# EAGLE board RS232_Websocket (EAGLE 7.2.0)
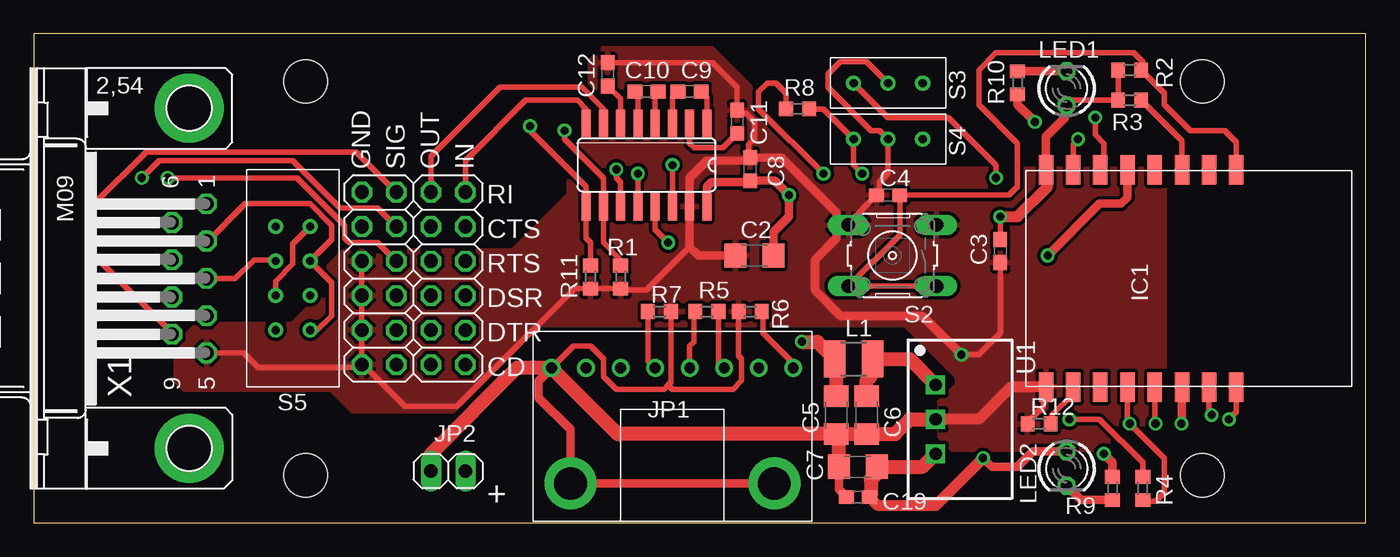
[diagram p0: board, top side]
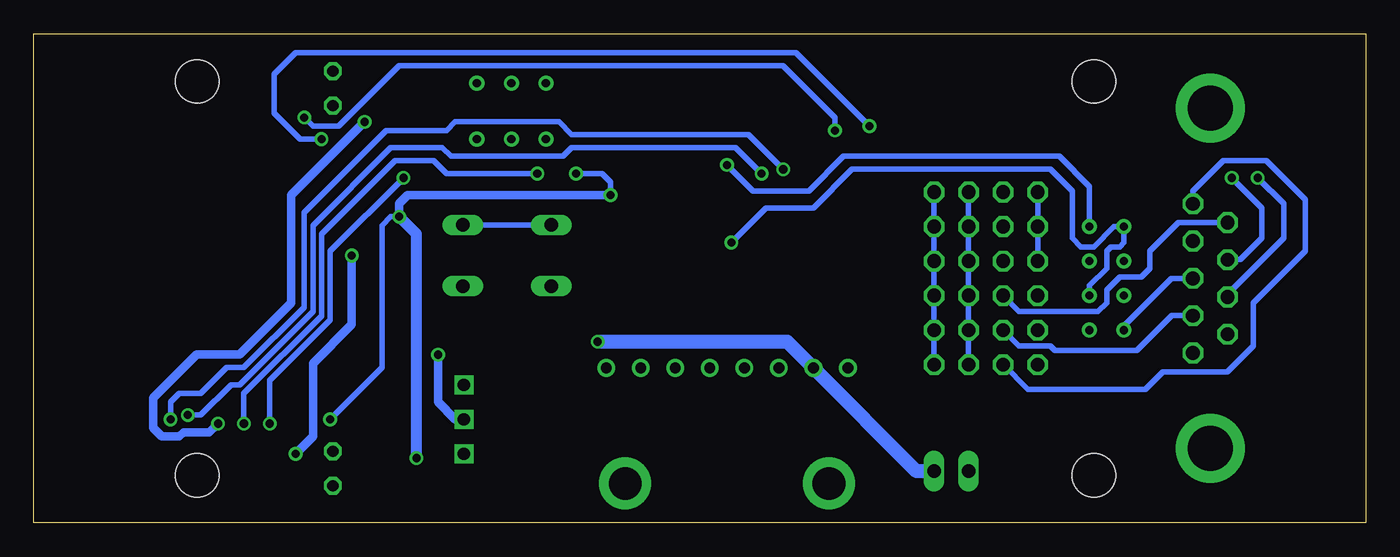
[diagram p1: board, bottom side, seen from below]

Size 98 x 36 mm. Coordinates in mm from the lower left corner, seen from the top.
Outline: 0,0 98,0 98,36 0,36 0,0
Copper layers (1*16): Top 0.035mm / dielectric 1.5mm / Bottom 0.035mm
Design rules "default *": minimum track width 10mil, minimum drill 18mil, track to track 8mil, track to pad 8mil, pad to pad 8mil, via to via 8mil, smd to smd 8mil, copper to edge 34mil, drill to drill 8mil, minimum pad ring 10mil, minimum via ring 8mil, stop-mask expansion 4mil, vias tented up to drill 0mil, thermal gap 10mil
Holes 3.2 mm at 20,32.5 20,3.5 86,32.5 86,3.5

## Footprints (pad centres in the part's own frame; a part is rotated, then mirrored left to right if it is on the bottom)
C1206 = smd 1.6 x 1.8: 1 -1.4,0; 2 1.4,0
C0603 = smd 1.1 x 1: 1 -0.85,0; 2 0.85,0
ESP8266MOD = smd 2.184 x 1.067: ADC -8,1.48; EN -8,-0.52; GND 8,-10.52; GPIO0 8,-4.52; GPIO2 8,-6.52; GPIO4 8,-2.52; GPIO5 8,-0.52; GPIO12 -8,-6.52; GPIO13 -8,-8.52; GPIO14 -8,-4.52; GPIO15 8,-8.52; GPIO16 -8,-2.52; RST -8,3.48; RXD 8,1.48; TXD 8,3.48; VCC -8,-10.52
SO16 = smd 0.66 x 2.032: 1 -4.445,-3.073; 2 -3.175,-3.073; 3 -1.905,-3.073; 4 -0.635,-3.073; 5 0.635,-3.073; 6 1.905,-3.073; 7 3.175,-3.073; 8 4.445,-3.073; 9 4.445,3.073; 10 3.175,3.073; 11 1.905,3.073; 12 0.635,3.073; 13 -0.635,3.073; 14 -1.905,3.073; 15 -3.175,3.073; 16 -4.445,3.073
USB-C_BREAKOUT = drill 0.8: CC1 1.27,-4.3; CC2 -8.89,-4.3; D+ -3.81,-4.3; D- -1.27,-4.3; GND 8.89,-4.3; S_BU1 -6.35,-4.3; S_BU2 3.81,-4.3; VBUS 6.35,-4.3 | drill 2.4 pad 3.81: G -7.5,4.2; G2 7.5,4.2
1X02 = drill 1.016 long: 1 -1.27,0; 2 1.27,0
2X06 = drill 1.016 octagon: 1 -6.35,-1.27; 2 -6.35,1.27; 3 -3.81,-1.27; 4 -3.81,1.27; 5 -1.27,-1.27; 6 -1.27,1.27; 7 1.27,-1.27; 8 1.27,1.27; 9 3.81,-1.27; 10 3.81,1.27; 11 6.35,-1.27; 12 6.35,1.27
R1210 = smd 1.6 x 2.7: 1 -1.4,0; 2 1.4,0
LED3MM = drill 0.813 octagon: A -1.27,0; K 1.27,0
R0603 = smd 1 x 1.1: 1 -0.85,0; 2 0.85,0
B3F-10XX = drill 1.016 long: 1 -3.251,2.261; 2 3.251,2.261; 3 -3.251,-2.261; 4 3.251,-2.261
2POS_SWITCH = drill 0.6: L -2.54,0; M 0,0; R 2.54,0
3X2_SWITCH = drill 0.6: 1L -3.81,1.27; 1R -3.81,-1.27; 2L -1.27,1.27; 2R -1.27,-1.27; 3L 1.27,1.27; 3R 1.27,-1.27; 4L 3.81,1.27; 4R 3.81,-1.27
TSR-1 = drill 0.9 square: 1 -2.54,0; 2 0,0; 3 2.54,0
M09HP = drill 1.016 octagon: 1 -5.486,1.27; 2 -2.743,1.27; 3 0,1.27; 4 2.743,1.27; 5 5.486,1.27; 6 -4.115,-1.27; 7 -1.372,-1.27; 8 1.372,-1.27; 9 4.115,-1.27 | drill 3.302 pad 5.08: G1 -12.522,0; G2 12.522,0

## Placement (x,y rotation side)
C2  10µF  [C1206]  53.02,19.68 180 top
C3  100nF  [C0603]  71.12,20 270 top
C4  47nF  [C0603]  62.87,24.13 0 top
C5  4.7µF  [C1206]  59.05,7.94 270 top
C6  4.7µF  [C1206]  61.28,7.94 270 top
C7  10µF  [C1206]  60.64,4.13 180 top
C8  100nF  [C0603]  52.7,26.04 90 top
C9  100nF  [C0603]  48.26,31.75 0 top
C10  100nF  [C0603]  45.09,31.75 0 top
C11  100nF  [C0603]  51.75,29.53 270 top
C12  100nF  [C0603]  42.23,33.02 270 top
C19  100nF  [C0603]  60.64,1.91 180 top
IC1  ESP8266MOD_AI  [ESP8266MOD]  85,18 270 top
IC2  MAX3232SO16  [SO16]  45.09,26.35 180 top
JP1  USB-C_BREAKOUT  [USB-C_BREAKOUT]  46.99,7.1 180 top
JP2  Backup Supply  [1X02]  30.48,3.81 0 top
JP3  [2X06]  25.4,18 90 top
JP4  [2X06]  30.48,18 90 top
L1  L-EU-SMD  [R1210]  60.33,12.06 0 top
LED1  [LED3MM]  76,32 90 top
LED2  [LED3MM]  76,4 270 top
R1  10k  [R0603]  43.18,18.1 90 top
R2  10k  [R0603]  80.64,33.34 180 top
R3  10k  [R0603]  80.64,31.11 180 top
R4  10k  [R0603]  81.6,2.54 90 top
R5  100k  [R0603]  49.53,15.56 0 top
R6  10k  [R0603]  52.7,15.56 180 top
R7  10k  [R0603]  46.04,15.56 0 top
R8  10k  [R0603]  56.2,30.48 180 top
R9  220R ?  [R0603]  79.38,2.54 270 top
R10  220R ?  [R0603]  72.39,32.38 90 top
R11  10k  [R0603]  40.96,18.1 90 top
R12  10k  [R0603]  73.98,7.3 0 top
S2  RESET  [B3F-10XX]  63.18,19.68 180 top
S3  Boot Mode Switch  [2POS_SWITCH]  62.87,32.38 0 top
S4  Config Switch  [2POS_SWITCH]  62.87,28.26 0 top
S5  3X2_SWITCH  [3X2_SWITCH]  19.05,18 90 top
U1  TSR_1-2433  [TSR-1]  66.36,7.62 270 top
X1  [M09HP]  11.43,18 270 top

## Library data of the parts
C2-C12 C19 R1-R12 = resistor
IC1 = ESP8266MOD_AiThinker
IC2 = maxim-7a
JP1 = USB-C Breakout Ada
JP2-JP4 = pinhead
L1 = HansSeine
LED1 LED2 = led
S2 = switch-omron; MPN: B3F-1000; OC_FARNELL: 176432; OC_NEWARK: 36M3542
S3 S4 = 3-Step-Switch
S5 = Switches
U1 = _traco_tsr-1
X1 = con-subd; OC_FARNELL: unknown; OC_NEWARK: unknown

## Nets
CD: JP3.1 X1.1
CTS: JP3.9 X1.8
DSR: JP3.5 X1.6
DTR: JP3.3 X1.4
GND: C2.2 C3.2 C4.1 C5.2 C6.2 C7.2 C8.2 C11.1 C12.1 C19.2 IC1.GND IC2.15 JP1.G JP1.G2 JP1.GND JP2.1 JP3.2 JP3.4 JP3.6 JP3.8 JP3.10 JP3.12 R1.1 R6.2 R7.2 R11.1 R12.1 S2.3 S2.4 S3.M S4.M U1.2 X1.5
N$1: C5.1 JP1.VBUS JP2.2 L1.1
N$2: C4.2 IC1.RST R2.1 S2.1 S2.2
N$3: IC1.GPIO15 R12.2
N$4: JP1.D- R5.1
N$5: JP1.D+ R5.2
N$6: JP1.CC2 R6.1
N$7: JP1.CC1 R7.1
N$8: IC1.EN R3.1
N$9: IC1.GPIO0 R4.1 S3.L
N$12: IC1.GPIO4 R8.1 S4.L
N$16: LED2.K R9.2
N$17: IC1.GPIO14 R9.1
N$18: LED1.K R10.2
N$19: IC1.GPIO5 R10.1
N$22: IC2.13 S5.2R S5.4L
N$23: IC2.14 S5.2L S5.4R
N$24: IC2.7 JP4.2 JP4.4 JP4.6 JP4.8 JP4.10 JP4.12
N$25: IC2.8 JP4.1 JP4.3 JP4.5 JP4.7 JP4.9 JP4.11
N$26: C11.2 IC2.2
N$27: C12.2 IC2.6
N$28: C10.1 IC2.5
N$29: C10.2 IC2.4
N$30: C9.1 IC2.3
N$31: C9.2 IC2.1
N$32: IC1.TXD IC2.11
N$33: IC1.RXD IC2.12
N$34: IC1.GPIO12 IC2.10 R1.2
N$35: IC1.GPIO13 IC2.9 R11.2
RI: JP3.11 X1.9
RTS: JP3.7 X1.7
RX: S5.1R S5.3R X1.2
TX: S5.1L S5.3L X1.3
VCC: C2.1 C3.1 C7.1 C8.1 C19.1 IC1.VCC IC2.16 LED1.A LED2.A R2.2 R3.2 R4.2 R8.2 U1.3
VI: C6.1 L1.2 U1.1

## Tracks (layer width: path | path; a pad name or v marks a point on that pad's centre or on a via)
CD
  Bottom 0.406: X1.1 12.7,24.45 10.48,26.67 7.3,26.67 4.45,23.81 4.45,20 8.26,16.19 8.26,13.02 10.16,11.11 14.92,11.11 16.19,9.84 24.86,9.84 JP3.1
CTS  (via drill 0.6)
  Top 0.406: v7.94,25.4 9.21,26.67 19.05,26.67 22.54,23.18 25.3,23.18 JP3.9
  Bottom 0.406: X1.8 10.16,16.83 6.03,20.95 6.03,23.5 v7.94,25.4
DSR
  Bottom 0.406: X1.6 13.76,22.11 15.88,20 15.88,18.73 16.51,18.1 18.1,18.1 19.05,17.14 19.05,16.19 19.68,15.56 25.5,15.56 JP3.5
DTR
  Bottom 0.406: X1.4 14.27,15.26 16.83,12.7 22.86,12.7 23.18,13.02 25.5,13.02 JP3.3
GND  (via drill 0.6)
  Top 0.406: X1.5 15.43,12.51 16.51,11.43 23.91,11.43 | 23.91,11.43 JP3.2 JP3.4 JP3.6 JP3.8 | C12.1 49.95,33.87 51.75,32.07 C11.1 51.97,30.16 52.39,30.16 53.02,29.53 53.02,28.26 52.6,27.84 52.6,26.99 | 23.91,11.43 24.45,11.43 27.3,8.57 31.11,8.57 39.79,17.25 R11.1 R1.1 43.28,17.14 45.09,17.14 48.26,20.32 | C3.2 71.12,13.97 69.53,12.38 v68.26,12.38 | S2.4 59.93,22.05 C4.1 62.23,24.34 62.23,25.08 62.87,25.72 S4.M 62.23,28.89 61.59,28.89 58.42,32.07 58.42,33.02 59.37,33.97 61.28,33.97 S3.M | R7.2 46.89,10.38 46.67,10.16 | 46.67,10.16 46.35,9.84 42.86,9.84 41.91,10.79 41.91,12.06 40.96,13.02 39.72,13.02 JP1.GND | R6.2 51.85,12.28 52.07,12.06 52.07,10.48 51.44,9.84 46.99,9.84 46.67,10.16 | R12.1 73.13,7.41 74.3,8.57 74.3,9.81 IC1.GND
  Top 0.61: C7.2 59.24,2.46 C19.2 | JP1.GND 37.15,10.45 37.15,9.21 39.49,6.87 JP1.G2 JP1.G | 52.6,26.99 C8.2 | C8.2 55.03,26.89 59.05,22.86 59.05,21.91 | v68.26,12.38 65.41,15.24 59.37,15.24 57.47,17.14 57.47,19.37 59.05,20.95 59.05,21.91 | C8.2 52.49,26.67 49.53,26.67 48.26,25.4 IC2.15 48.26,20.32 48.9,19.68 C2.2 | S2.4 59.09,21.95 59.05,21.91
  Top 0.813: IC1.GND 71.91,10 69.53,7.62 U1.2
  Top 1.016: C5.2 42.96,6.54 JP1.GND 38.07,11.43 35.56,11.43 29.21,5.08 JP2.1 | C5.2 C6.2 63.37,6.54 64.45,7.62 U1.2 | C7.2 59.24,6.35 C5.2
  Bottom 0.406: JP3.8 JP3.10 JP3.12 | S2.4 S2.3
  Bottom 0.61: v68.26,12.38 68.26,8.89 66.99,7.62 U1.2
  pour Top (isolate 0.254): 11.11,9.84 21.91,9.84 23.5,8.26 30.8,8.26 35.88,13.34 37.15,14.61 64.14,14.61 67.94,10.79 67.94,10.16 66.67,8.89 66.67,6.35 67.63,5.4 81.28,5.4 83.19,7.3 83.19,25.08 82.23,26.04 58.74,26.04 55.24,29.53 49.53,35.24 42.23,35.24 40.96,33.97 40.96,28.89 39.37,27.3 39.37,24.13 35.24,20 22.86,20 21.59,18.73 21.59,17.14 19.05,14.61 12.06,14.61 10.48,13.02 10.48,10.48
N$1  (via drill 0.6)
  Top 1.016: C5.1 59.05,11.94 L1.1 57.66,13.34 v56.52,13.34
  Bottom 1.016: JP2.2 33.05,3.81 JP1.VBUS 42.55,13.3 42.55,13.34 v56.52,13.34
N$2
  Top 0.406: IC1.RST 88.48,28.04 87.63,28.89 85.09,28.89 83.19,30.8 83.19,31.65 R2.1 81.6,33.44 81.6,33.97 80.96,34.61 70.8,34.61 69.53,33.34 69.53,30.8 72.39,27.94 72.39,24.77 71.75,24.13 C4.2 63.72,21.21 S2.2 S2.1
N$3
  Top 0.406: IC1.GPIO15 76.48,9.49 74.93,7.94 74.93,7.41 R12.2
N$4
  Top 0.406: JP1.D- 48.26,13.02 48.58,13.34 48.58,15.46 R5.1
N$5
  Top 0.406: JP1.D+ 50.38,11.82 R5.2
N$6
  Top 0.406: JP1.CC2 55.88,11.75 53.66,13.97 53.66,15.46 R6.1
N$7
  Top 0.406: R7.1 45.19,11.93 JP1.CC1
N$8
  Top 0.406: IC1.EN 84.48,28.13 R3.1
N$9  (via drill 0.6)
  Top 0.406: R4.1 81.7,1.59 82.55,1.59 83.19,2.22 83.19,4.76 v80.64,7.3 80.48,7.47 IC1.GPIO0 | v70.8,25.4 70.8,26.35 67.31,29.84 62.87,29.84 S3.L
  Bottom 0.406: v70.8,25.4 76.2,20 76.2,14.92 80.64,10.48 v80.64,7.3
N$12  (via drill 0.6)
  Top 0.406: IC1.GPIO4 82.48,7.37 v82.55,7.3 | R8.1 58.1,30.48 S4.L 60.33,26.35 v60.96,25.72
  Bottom 0.406: v60.96,25.72 67.63,25.72 68.58,26.67 71.44,26.67 76.83,21.27 76.83,15.24 82.55,9.53 v82.55,7.3
N$16
  Top 0.61: R9.2 77.04,1.69 LED2.K
N$17  (via drill 0.6)
  Top 0.61: R9.1 79.38,4.45 v78.74,5.08 | v74.61,19.68 78.42,23.5 80.01,23.5 80.48,23.96 IC1.GPIO14
  Bottom 0.61: v78.74,5.08 77.47,6.35 77.47,11.75 74.61,14.61 v74.61,19.68
N$18
  Top 0.61: LED1.K 72.42,33.27 R10.2
N$19  (via drill 0.6)
  Top 0.406: 84.48,7.33 v84.45,7.3
  Top 0.61: IC1.GPIO5 84.48,7.33 | v73.66,29.53 72.39,30.8 R10.1
  Bottom 0.61: v84.45,7.3 85.09,6.67 87,6.67 87.31,6.35 88.58,6.35 89.22,6.99 89.22,9.21 86.04,12.38 82.87,12.38 79.06,16.19 79.06,24.13 v73.66,29.53
N$22  (via drill 0.6)
  Top 0.406: v46.67,20.64 45.72,21.59 IC2.13
  Bottom 0.406: S5.2R 20.32,17.46 19.05,18.73 19.05,20 18.73,20.32 18.1,20.32 17.78,20.64 S5.4L 18.51,21.81 20,20.32 20.95,20.32 21.59,20.95 21.59,24.45 23.18,26.04 37.78,26.04 40.64,23.18 44.13,23.18 v46.67,20.64
N$23  (via drill 0.6)
  Top 0.406: S5.2L 17.78,17.78 19.05,19.05 19.05,20.54 S5.4R | v46.99,26.35 IC2.14
  Bottom 0.406: S5.4R 20.32,24.77 22.54,26.99 38.42,26.99 40.96,24.45 45.09,24.45 v46.99,26.35
N$24
  Top 0.406: IC2.7 41.91,30.48 40.32,32.07 34.29,32.07 29.21,26.99 JP4.12
  Bottom 0.406: JP4.2 JP4.4 JP4.6 JP4.8 JP4.10 JP4.12
N$25
  Top 0.406: IC2.8 40.64,30.48 40.01,31.11 36.2,31.11 31.75,26.67 JP4.11
  Bottom 0.406: JP4.1 JP4.3 JP4.5 JP4.7 JP4.9 JP4.11
N$26
  Top 0.406: IC2.2 48.26,27.94 48.58,27.62 50.7,27.62 C11.2
N$27
  Top 0.406: IC2.6 43.18,31.22 C12.2
N$28
  Top 0.406: IC2.5 44.45,31.54 C10.1
N$29
  Top 0.406: IC2.4 45.72,31.54 C10.2
N$30
  Top 0.406: IC2.3 46.99,31.33 C9.1
N$31
  Top 0.406: IC2.1 49.53,31.33 C9.2
N$32  (via drill 0.6)
  Top 0.406: v42.86,26.04 42.86,25.4 43.18,25.08 IC2.11 | IC1.TXD 88.48,8.15 v87.95,7.62
  Bottom 0.406: v42.86,26.04 45.4,28.57 58.42,28.57 59.37,29.53 66.99,29.53 67.63,28.89 72.07,28.89 78.11,22.86 78.11,15.88 82.55,11.43 83.82,11.43 85.72,9.53 87.31,9.53 87.95,8.89 v87.95,7.62
N$33  (via drill 0.6)
  Top 0.406: IC1.RXD 86.48,8.13 v86.68,7.94 | v44.45,25.72 IC2.12
  Bottom 0.406: v86.68,7.94 85.72,7.94 83.5,10.16 82.87,10.16 77.47,15.56 77.47,21.91 71.75,27.62 67.94,27.62 67.31,26.99 59.05,26.99 58.42,27.62 46.35,27.62 v44.45,25.72
N$34  (via drill 0.6)
  Top 0.406: R1.2 43.18,19.37 41.91,20.64 IC2.10 41.91,25.4 39.05,28.26 v39.05,28.89 | IC1.GPIO12 78.74,26.26 78.74,27.94 78.11,28.57 v78.11,29.84
  Bottom 0.406: v78.11,29.84 77.47,29.21 75.56,29.21 71.12,33.66 42.86,33.66 39.05,29.84 v39.05,28.89
N$35  (via drill 0.6)
  Top 0.406: R11.2 40.96,20.64 40.64,20.95 IC2.9 40.64,24.77 36.51,28.89 v36.51,29.21 | v76.83,28.26 76.48,27.9 IC1.GPIO13
  Bottom 0.406: v36.51,29.21 41.91,34.61 78.74,34.61 80.33,33.02 80.33,30.16 78.42,28.26 v76.83,28.26
RI
  Top 0.406: X1.9 10.16,13.97 4.45,19.68 4.45,23.5 8.26,27.3 23.71,27.3 JP3.11
RTS  (via drill 0.6)
  Top 0.406: v9.84,25.4 19.37,25.4 22.86,21.91 22.86,20.95 23.18,20.64 25.3,20.64 JP3.7
  Bottom 0.406: X1.7 9.2,19.37 7.62,20.95 7.62,23.18 v9.84,25.4
RX
  Top 0.406: S5.1R 20.86,14.19 21.91,15.24 21.91,17.68 S5.3R 21.91,20.86 21.91,21.91 20.32,23.5 15.56,23.5 12.81,20.74 X1.2
TX
  Top 0.406: X1.3 14.82,18 16.19,19.37 17.68,19.37 S5.3L
  Bottom 0.406: S5.1L 17.78,14.51 14.29,18 X1.3
VCC  (via drill 0.6)
  Top 0.406: C3.1 v71.12,22.54 | R4.2 81.6,4.45 78.42,7.62 v76.2,7.62 | R2.2 R3.2 76.39,31.11 LED1.A | R8.2 55.35,31.65 54.61,32.38 53.98,32.38 53.34,31.75 53.34,30.48 v58.1,25.72
  Top 0.61: 61.91,4 C7.1 | IC2.16 49.53,24.77 49.85,25.08 52.6,25.08 C8.1 54.51,25.18 v55.56,24.13 55.56,22.54 54.42,21.4 C2.1 | LED2.A 73.53,5.27 72.39,4.13 70.48,4.13 v69.85,4.76 | IC1.VCC 74.48,28.44 75.88,29.84 75.88,30.61 LED1.A
  Top 0.813: v69.85,4.76 66.36,1.27 62.13,1.27 C19.1 61.59,2.01 | v71.12,22.54 72.39,22.54 74.61,24.77 74.61,25.87 IC1.VCC
  Top 1.016: C7.1 65.41,4.13 U1.3 | 61.91,4 61.91,3.49 61.59,3.17 61.59,2.01
  Bottom 0.406: v71.12,22.54 71.75,22.54 72.39,21.91 72.39,11.43 v76.2,7.62 | v58.1,25.72 56.2,25.72 55.56,25.08 v55.56,24.13
  Bottom 0.61: v55.56,24.13 70.48,24.13 71.12,23.5 v71.12,22.54
  Bottom 0.813: v69.85,4.76 69.85,21.27 v71.12,22.54
VI
  Top 1.016: C6.1 61.28,10.48 61.59,10.79 61.59,11.94 L1.2 64.45,12.06 U1.1

## Text on the board
tNames: GND | SIG | OUT | IN | RI | CTS | RTS | DSR | DTR | CD | +